# Altium PCB Etage PIC.PcbDoc
Units mm, origin at the board's own origin, x right, y up, seen from the top; angles counter-clockwise.
Board outline 70 x 70 mm, 4 copper layers (Top Layer, Internal Plane 1, Internal Plane 2, Bottom Layer); 22 components, 35 nets, 128 pads, 1 vias.
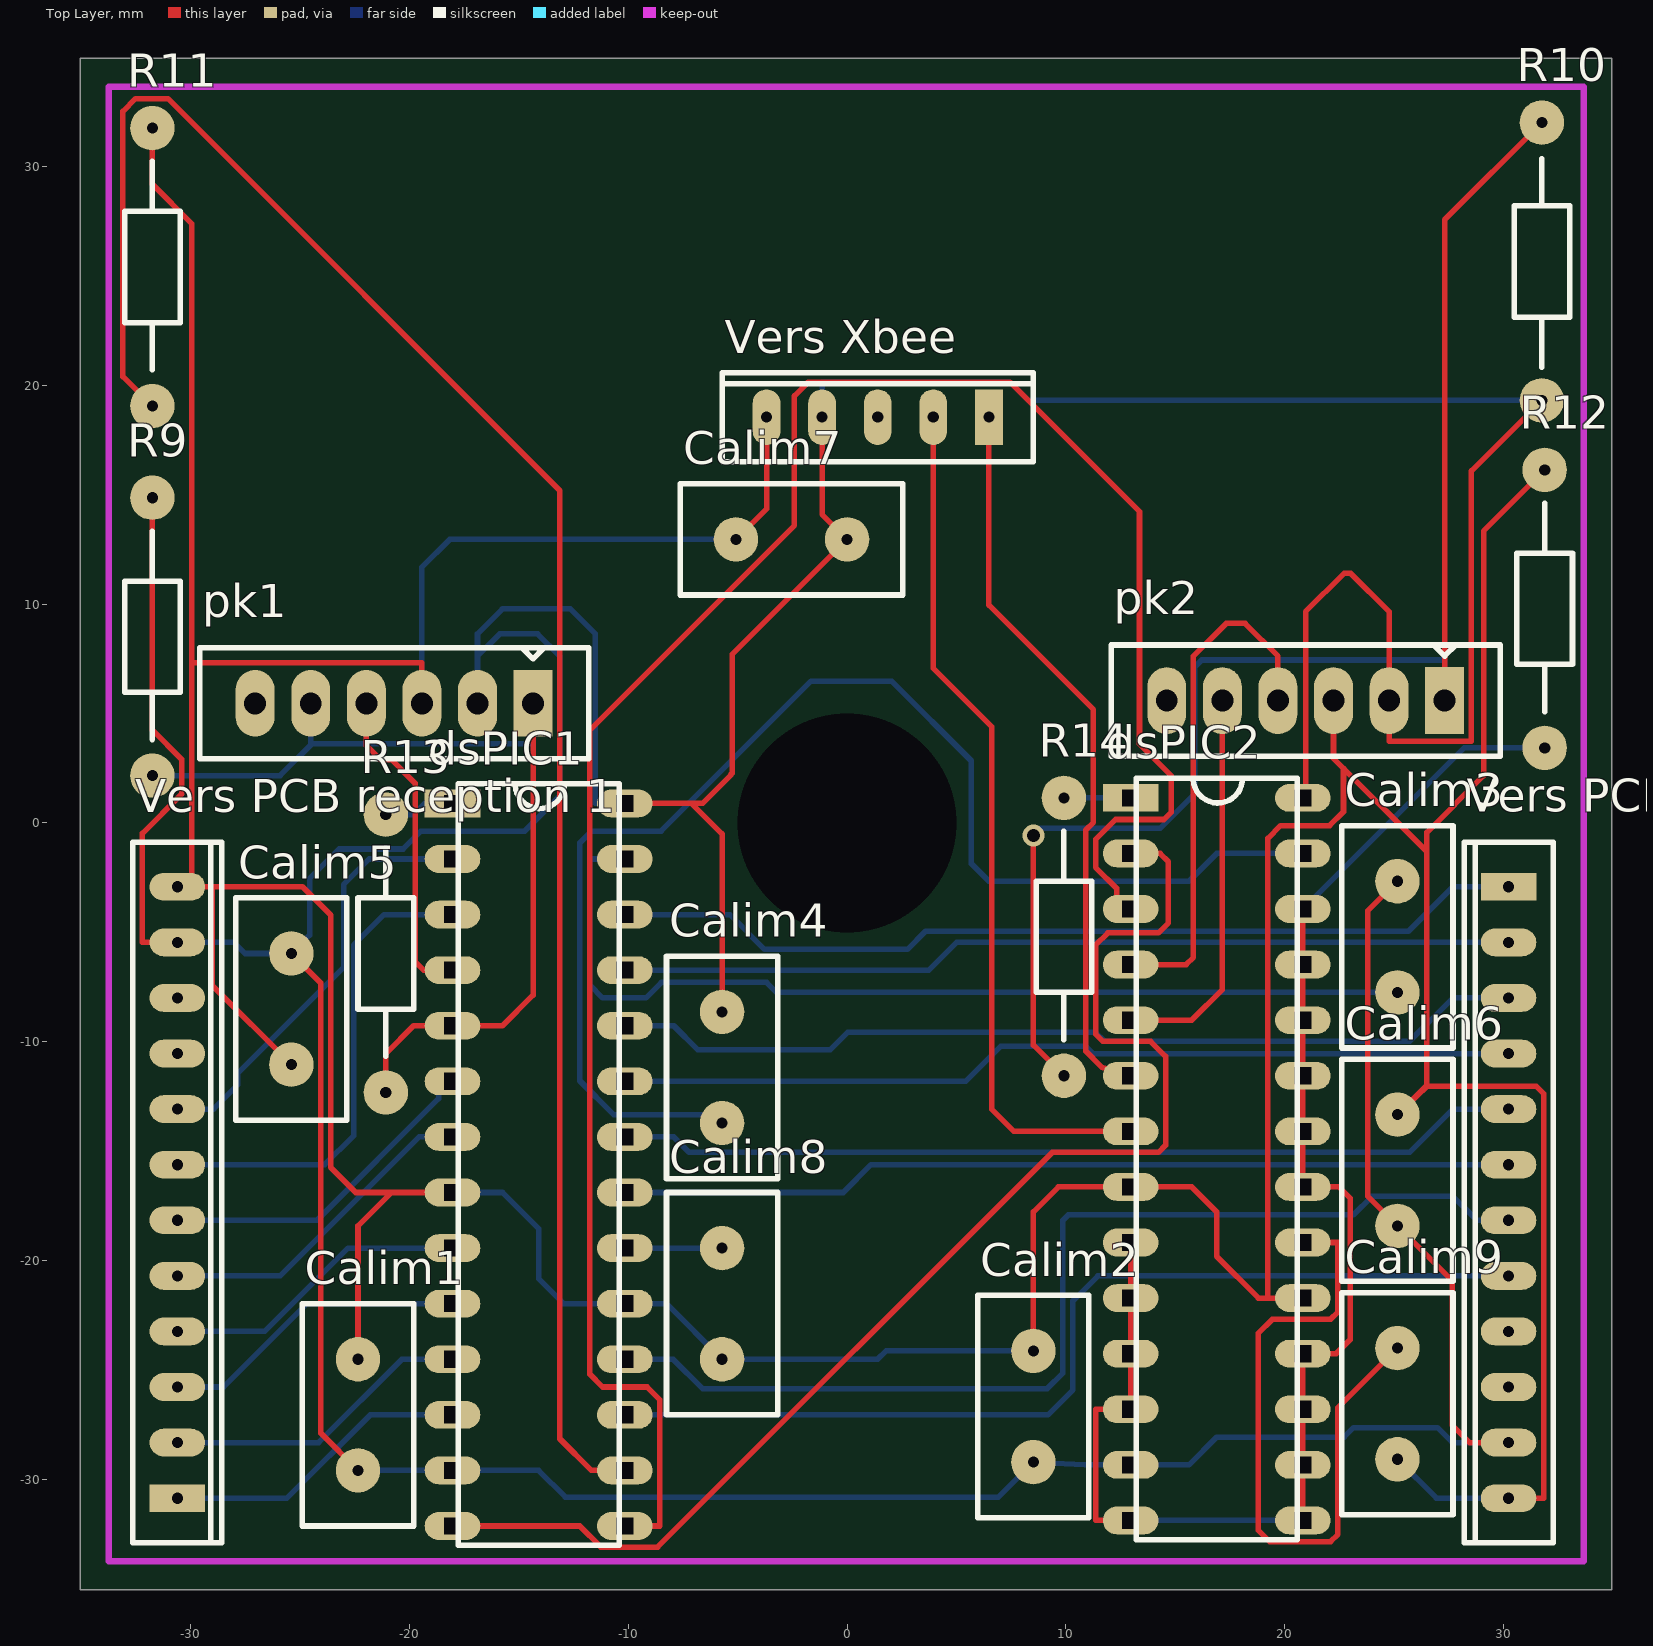
[diagram p0: Top Layer view]
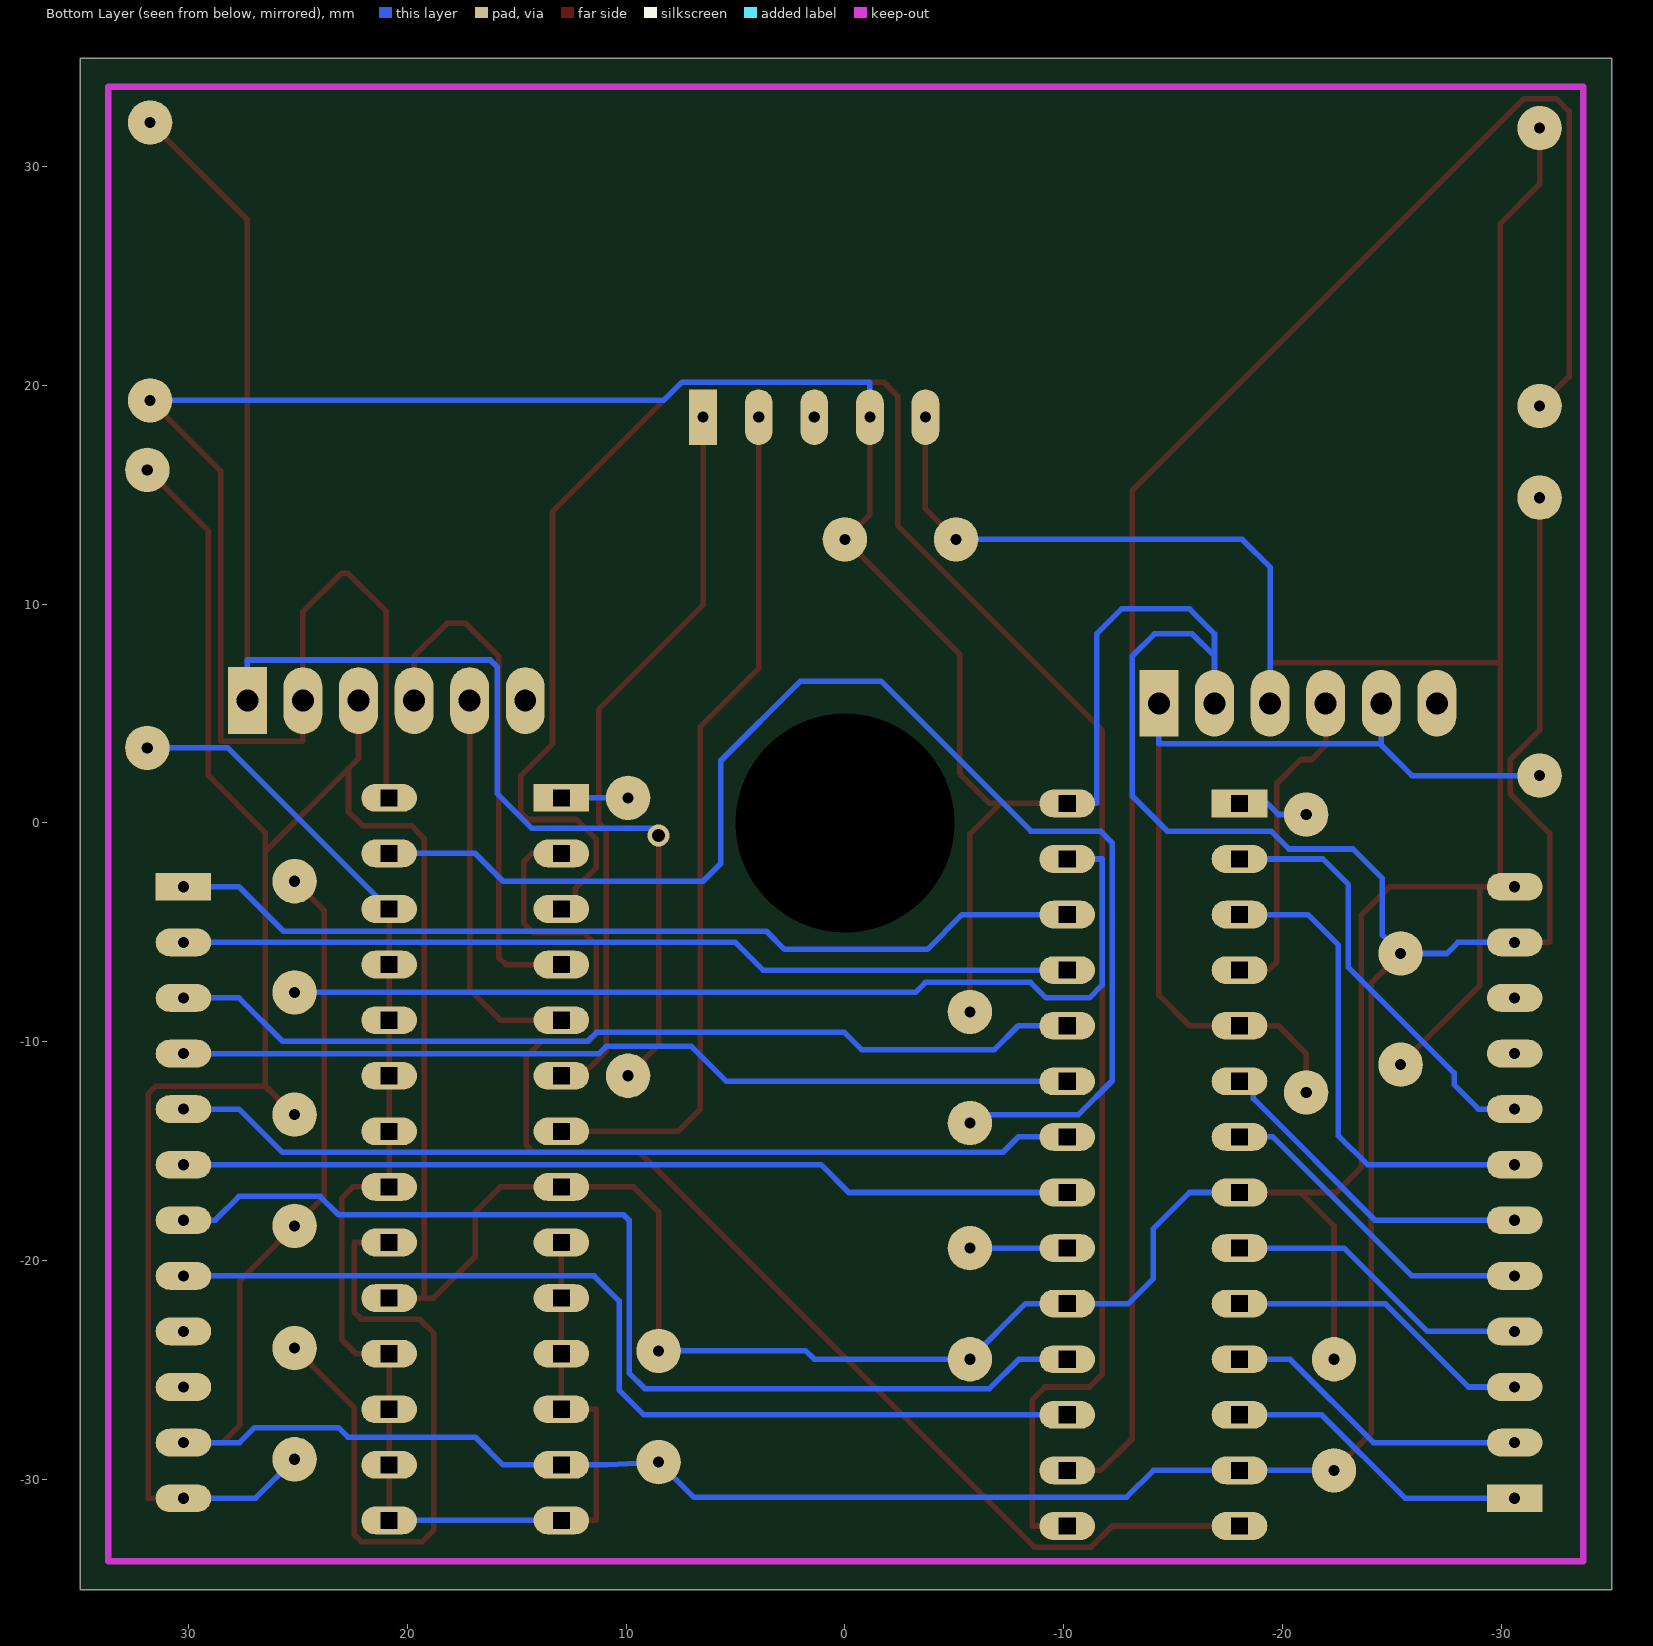
[diagram p1: Bottom Layer view, seen from below]
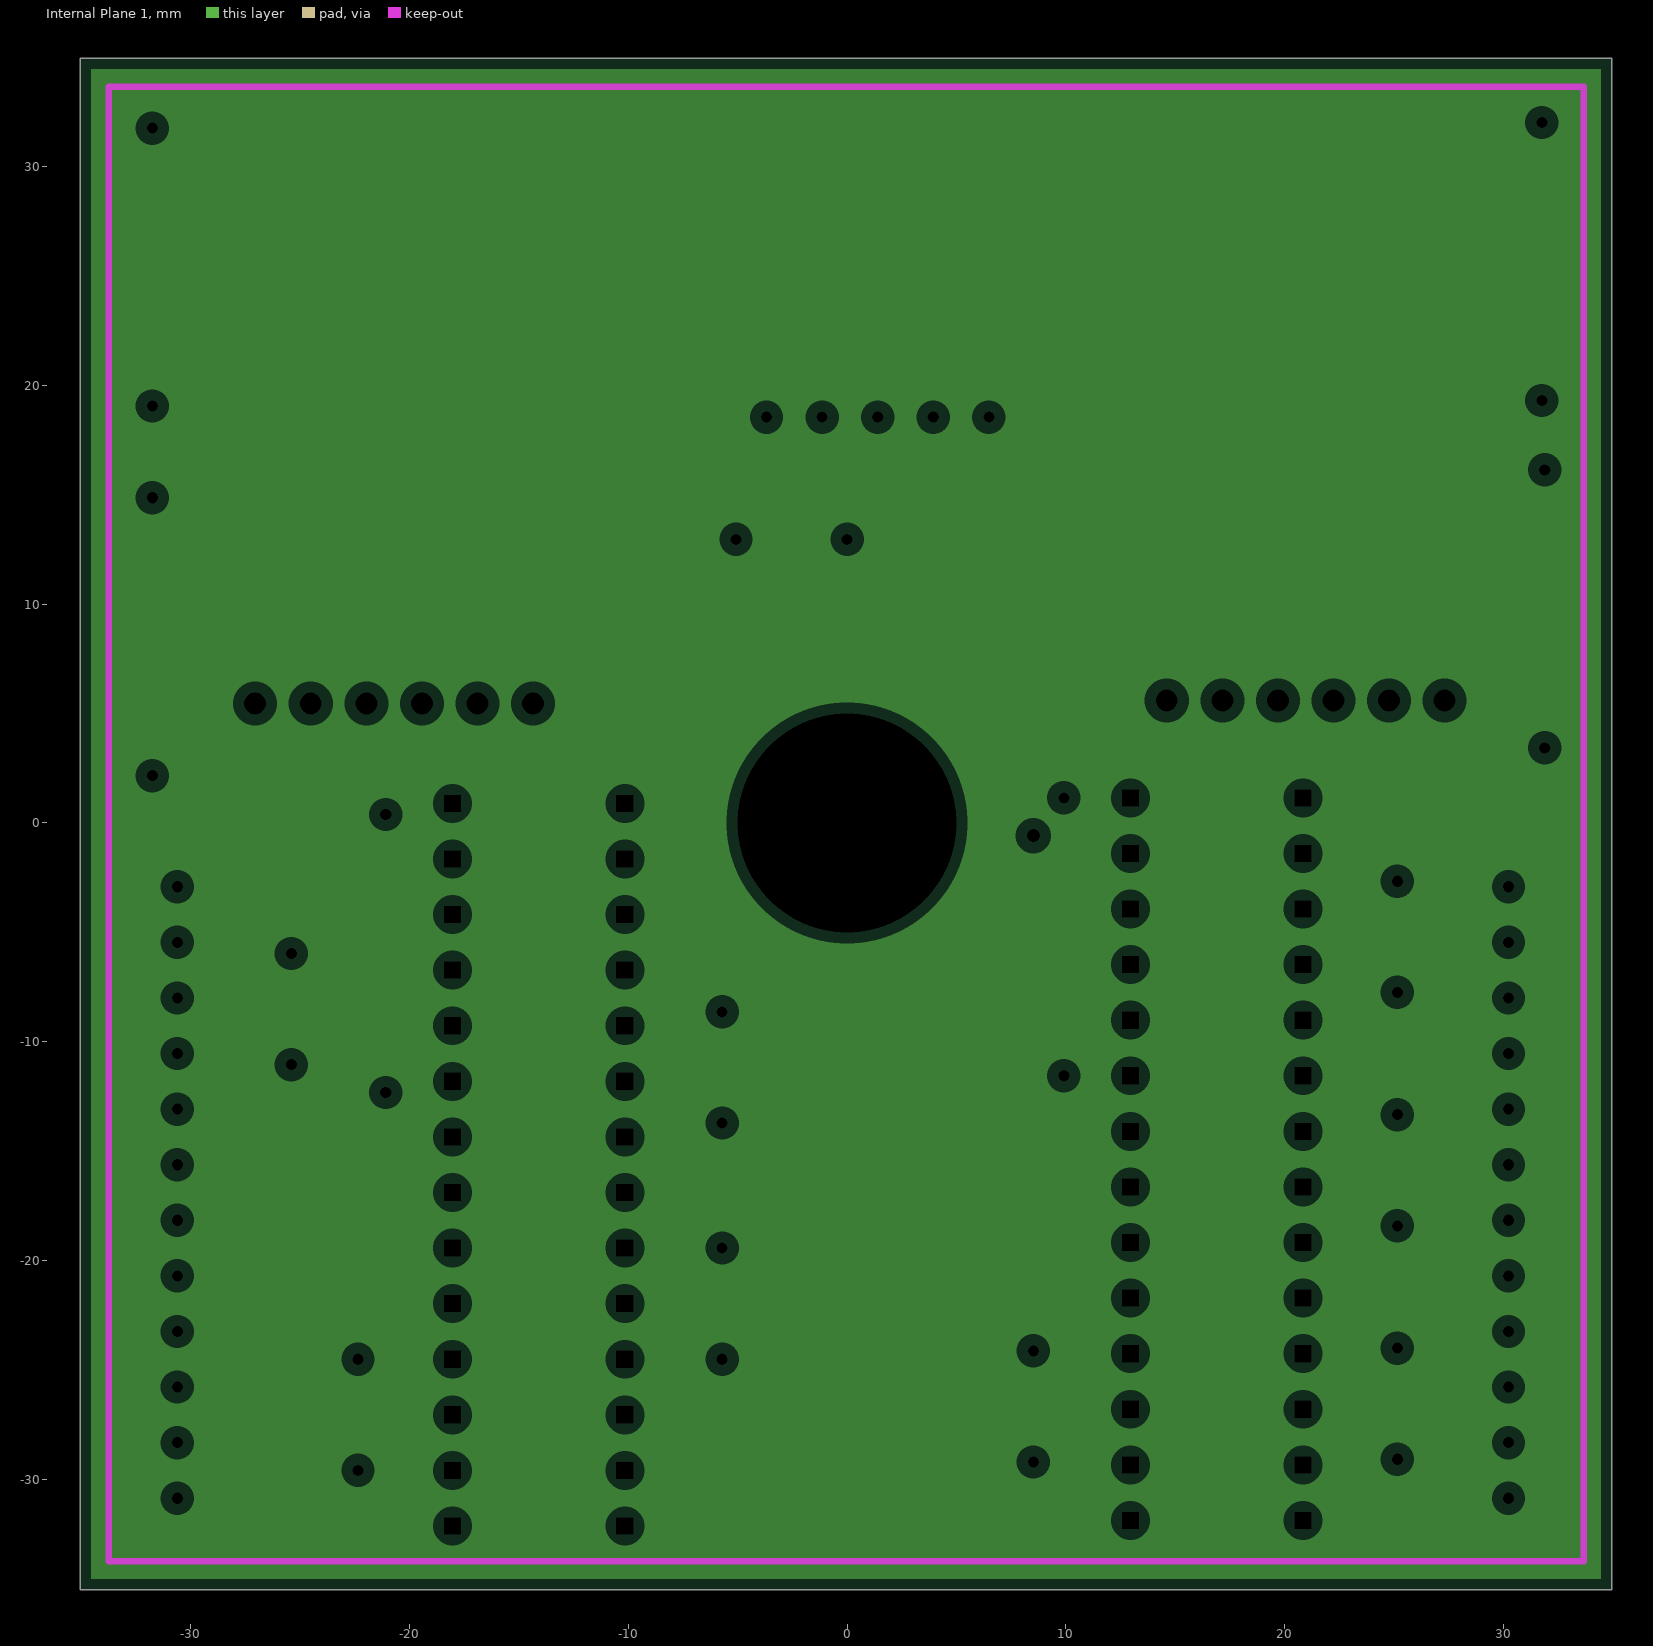
[diagram p2: Internal Plane 1, clearances drawn from the general rule]
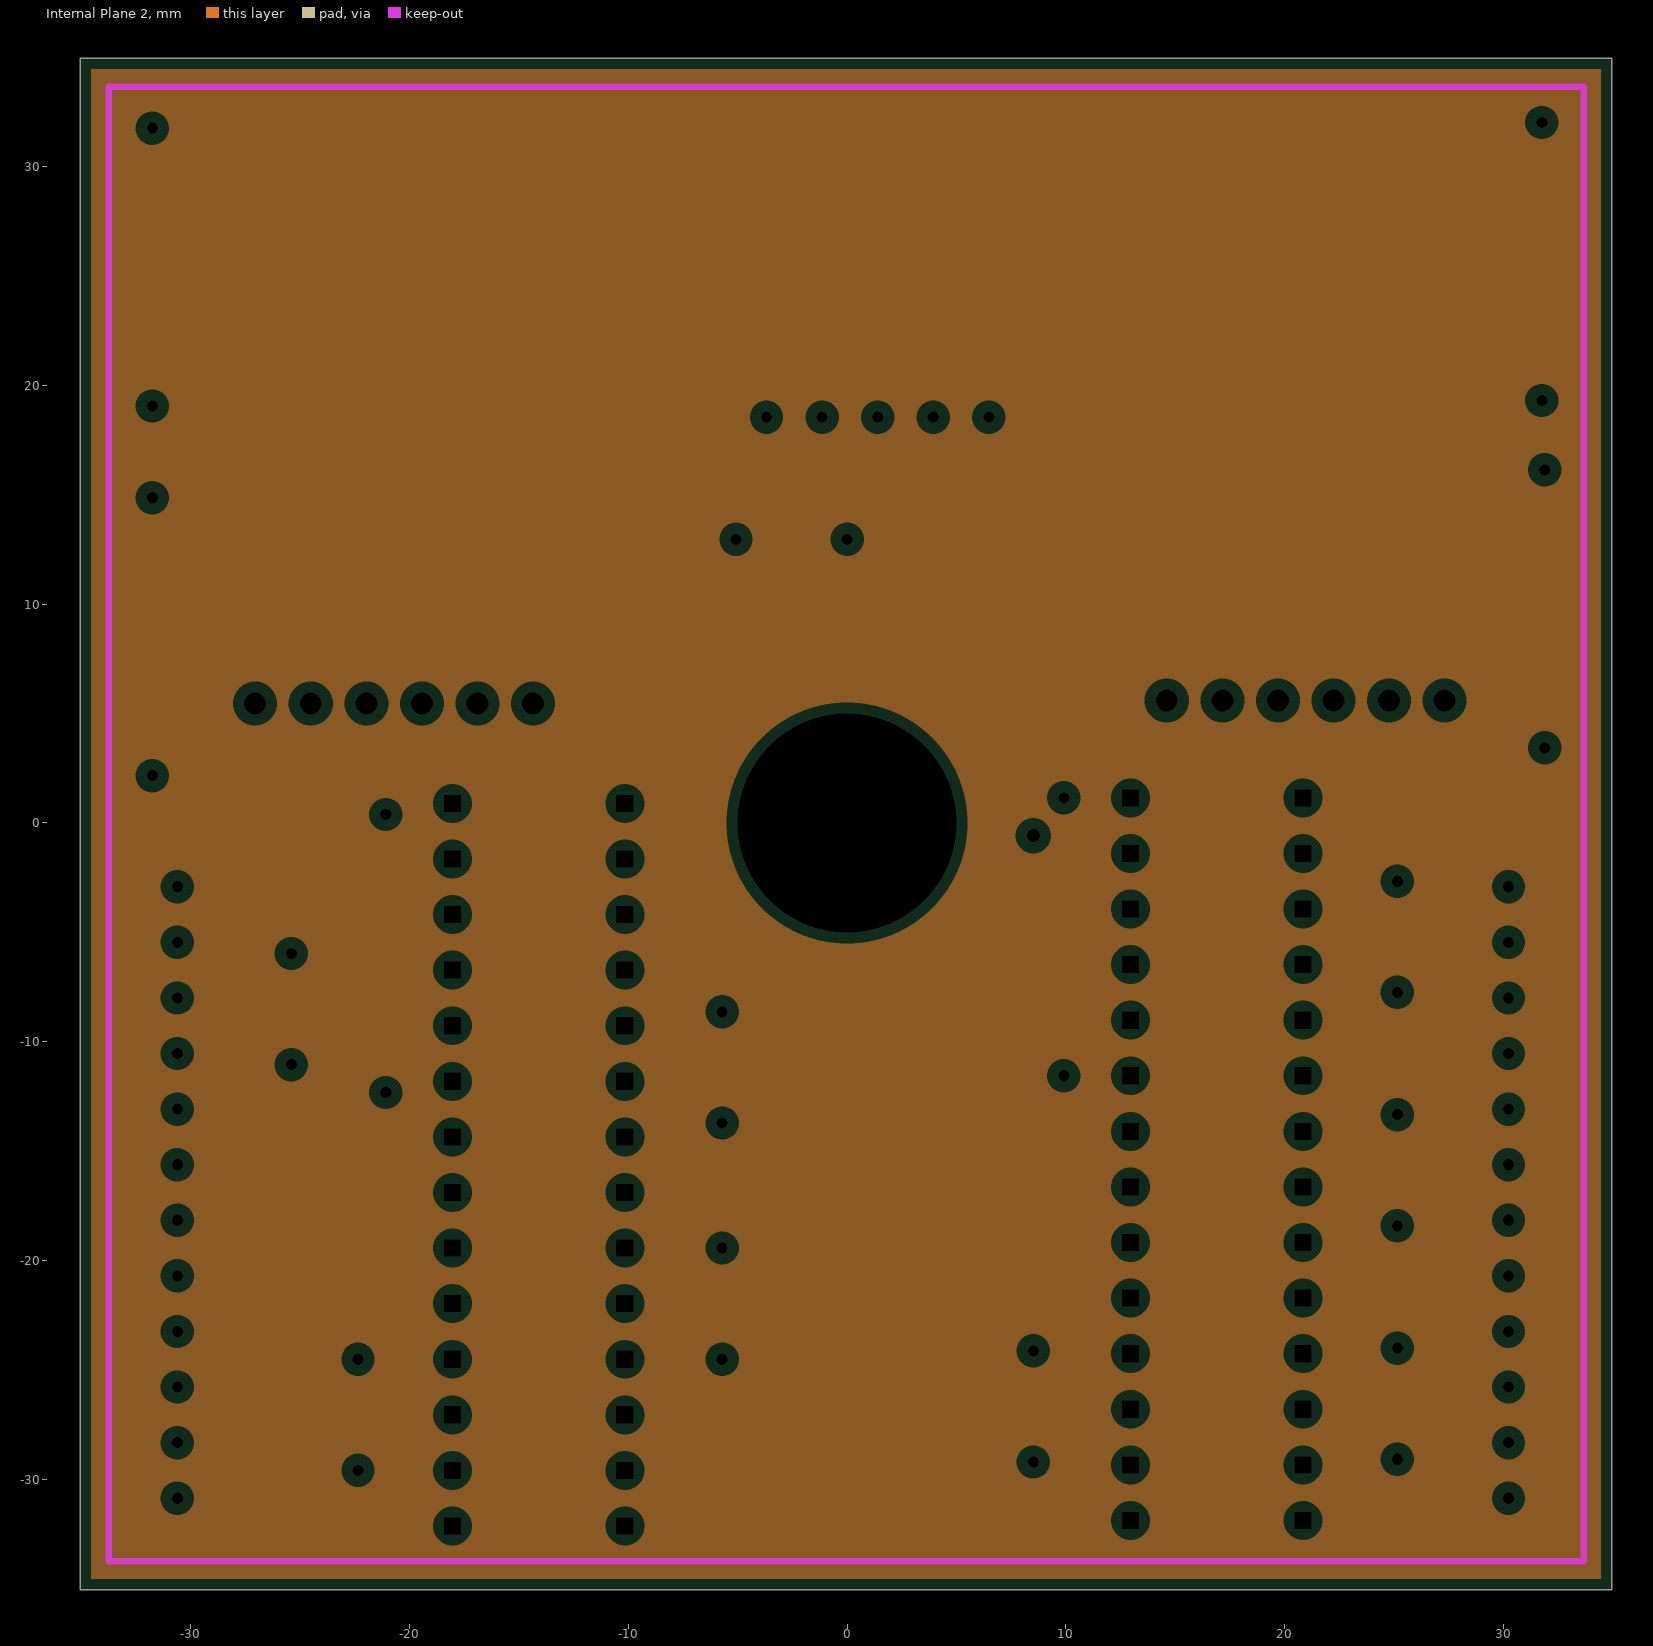
[diagram p3: Internal Plane 2, clearances drawn from the general rule]

## Layer stack, top to bottom
Top Layer: signal copper 0.0356
Dielectric: dielectric 0.32, FR-4, Dk 4.8
Internal Plane 1: plane copper 0.0356
Dielectric: dielectric 0.32, FR-4, Dk 4.8
Internal Plane 2: plane copper 0.0356
Dielectric: dielectric 0.32, FR-4, Dk 4.8
Bottom Layer: signal copper 0.0356

## Board outline
-35.052,-35.052 34.948,-35.052 34.948,34.948 -35.052,34.948

## Design rules (kind name [scope] priority, off if disabled: settings)
Clearance [All] p1: gap=0.2
PlaneClearance [All] p1: clearance=0.508
PlaneConnect [All] p1: planeconnectstyle=Relief reliefexpansion=0.508 reliefentries=4 reliefconductorwidth=0.254 reliefairgap=0.254
PolygonConnect [All] p1: connectstyle=Relief reliefconductorwidth=0.254 reliefentries=4 polygonreliefangle="90 Angle" airgapwidth=0.254
RoutingVias [All] p1: holewidth=0.6 width=1 viastyle="Through Hole" minholewidth=0.711 minwidth=1.27 maxholewidth=0.711 maxwidth=1.27
SolderMaskExpansion [All] p1: expansion=0.102
Width [All] p1: maxlimit=0.254 minlimit=0.254 preferedwidth=0.254
26 further rules are at their usual default settings.

## Components (designator, comment, footprint, x,y, rotation, side; value= is the part's Value field where it differs from the comment)
Calim1 "Cap2" CAPA2 -22.352,-29.591 r90 top
Calim2 "Cap2" CAPA2 8.509,-29.21 r90 top
Calim3 "Cap2" CAPA2 25.146,-2.667 r270 top
Calim4 "Cap2" CAPA2 -5.715,-8.636 r270 top
Calim5 "Cap2" CAPA2 -25.4,-11.049 r90 top
Calim6 "Cap2" CAPA2 25.146,-13.335 r270 top
Calim7 "Cap2" CAPA2 -5.08,12.954 r0 top
Calim8 "Cap2" CAPA2 -5.715,-19.431 r270 top
Calim9 "Cap2" CAPA2 25.146,-24.003 r270 top
dsPIC1 "dsPIC33FJ32MC" PCBComponent_1 -14.097,-15.621 r0 top
dsPIC2 "dsPIC33FJ32MC" PCBComponent_1 16.891,-15.367 r0 top
pk1 "pickit3" pickit3 -14.351,5.461 r180 top
pk2 "pickit3" pickit3 27.305,5.588 r180 top
R9 "Res2" res5_1/4W -31.75,14.859 r270 top
R10 "Res2" res5_1/4W 31.75,19.304 r90 top
R11 "Res2" res5_1/4W -31.75,31.75 r270 top
R12 "Res2" res5_1/4W 31.877,16.129 r270 top
R13 "Res2" res5_1/4W -21.082,0.381 r270 top
R14 "Res2" res5_1/4W 9.906,1.143 r270 top
"Vers PCB reception 1" "CONKK12" CONKK12 -30.607,-30.861 r90 top
"Vers PCB reception 2" "CONKK12" CONKK12 30.226,-2.921 r270 top
"Vers Xbee" "CONKK5" CONKK5 6.477,18.542 r180 top

## Footprints (in the part's own frame and the unit in brackets; to place one, negate y for a bottom-side part, rotate by r counter-clockwise, add the part's x,y. Pads: shape width x height; smd on the part's side, far side on the other; paste and mask are expansions set on the pad)
CAPA2 [mil]
  round 80 hole 20: 1(0,0) 2(200,0)
  silkscreen extent -100,-100 300,100
CONKK5 [mil]
  rect 50x100 hole 20: 1(0,0)
  oval 50x100 hole 20: 2(100,0) 3(200,0) 4(300,0) 5(400,0)
  silkscreen extent -80,-80 480,80
CONKK12 [mil]
  rect 50x100 hole 20: 1(0,0)
  oval 50x100 hole 20: 2(100,0) 3(200,0) 4(300,0) 5(400,0) 6(500,0) 7(600,0) 8(700,0) 9(800,0) 10(900,0) 11(1000,0) 12(1100,0)
  silkscreen extent -80,-80 1180,80
PCBComponent_1 [mil]
  rect 100x50 hole 30 square: 1(-155,650)
  oval 100x50 hole 30 square: 2(-155,550) 3(-155,450) 4(-155,350) 5(-155,250) 6(-155,150) 7(-155,50) 8(-155,-50) 9(-155,-150) 10(-155,-250) 11(-155,-350) 12(-155,-450) 13(-155,-550) 14(-155,-650) 15(155,-650) 16(155,-550) 17(155,-450) 18(155,-350) 19(155,-250) 20(155,-150) 21(155,-50) 22(155,50) 23(155,150) 24(155,250) 25(155,350) 26(155,450) 27(155,550) 28(155,650)
  silkscreen extent -145,-685 145,685
pickit3 [mil]
  rect 70x120 hole 39.37: 1(0,0)
  oval 70x120 hole 39.37: 2(100,0) 3(200,0) 4(300,0) 5(400,0) 6(500,0)
  silkscreen extent -100,-100 600,100
res5_1/4W [mil]
  round 80 hole 20: 1(0,0) 2(500,0)
  silkscreen extent 60,-50 435,50

## Part data
Calim1 Calim2 Calim3 Calim4 Calim5 Calim6 Calim7 Calim8 Calim9: "Capacitor"
R9 R10 R11 R12 R13 R14: "Resistor"

## Free pads (board coordinates)
  round 1.524 hole 10: 7(0,0)

## Via types
v1: diameter 1, hole 0.6, Top Layer to Bottom Layer, 1 vias

## Nets (pads, with @x,y where several pads share a name; then routed paths per layer and width w, separated by ;. In a path a pad name is that pad's centre, name@x,y a point inside that pad or via, vN(x,y) a via of type N, cw(c..) or ccw(c..) an arc to the next point about the centre after c; other vN are vias at no path point)
GND: "Vers PCB reception 1.12" "Vers PCB reception 2.12" "Vers Xbee.5" Calim1.2 Calim2.2 Calim5.1 Calim6.1 Calim7.1 Calim8.2 Calim9.2 dsPIC1.8 dsPIC1.19 dsPIC2.8 dsPIC2.19 pk1.3 pk2.3 R11.1 R12.1 | length 272.8
  Top Layer w0.254: R11.1 -31.75,29.185 -29.953,27.388 -29.953,7.315 ; -30.607,-2.921 -29.953,-2.921 ; Calim5.1 -29.007,-7.442 -29.007,-2.921 ; Calim1.2 -22.352,-18.415 -20.828,-16.891 ; pk1.3 -19.431,7.315 -29.953,7.315 ; dsPIC1.8 -20.828,-16.891 ; Calim7.1 -3.683,14.351 -3.683,18.542 ; Calim2.2 8.509,-17.78 9.652,-16.637 dsPIC2.8 15.748,-16.637 16.891,-17.78 16.891,-19.812 18.796,-21.717 19.228,-21.717 ; dsPIC2.19 19.228,-21.717 ; pk2.3 22.225,2.946 22.682,2.489 ; 30.226,-30.861 31.826,-30.861 31.826,-12.37 31.496,-12.04 26.492,-12.04 ; R12.1 29.083,13.335 29.083,2.159 26.492,-0.432 26.492,-1.321 ; -29.953,-2.921 -29.953,7.315 ; -29.953,-2.921 -29.007,-2.921 ; -29.007,-2.921 -24.892,-2.921 -23.597,-4.216 -23.597,-15.748 -22.454,-16.891 -20.828,-16.891 ; 19.228,-21.717 19.228,-0.711 19.812,-0.127 22.047,-0.127 22.682,0.508 22.682,2.489 ; 22.682,2.489 26.492,-1.321 ; 26.492,-12.04 26.492,-1.321 ; 26.492,-12.04 26.441,-12.04 Calim6.1 26.492,-12.04
  Bottom Layer w0.254: pk1.3 -19.431,11.684 -18.161,12.954 Calim7.1 ; dsPIC1.8 -15.748,-16.891 -14.097,-18.542 -14.097,-20.828 -12.954,-21.971 dsPIC1.19 -8.255,-21.971 Calim8.2 1.397,-24.511 1.778,-24.13 Calim2.2 ; Calim9.2 26.924,-30.861 30.226,-30.861
NetCalim3_2: Calim3.2 dsPIC1.27 | length 45
  Bottom Layer w0.254: dsPIC1.27 -11.76,-1.651 -11.76,-7.417 -11.176,-8.001 -9.195,-8.001 -8.484,-7.29 -3.683,-7.29 -3.226,-7.747 Calim3.2
NetCalim4_2: Calim4.2 dsPIC2.27 | length 61.6
  Bottom Layer w0.254: Calim4.2 -5.715,-13.335 -10.668,-13.335 -12.217,-11.786 -12.217,-0.914 -11.684,-0.381 -8.502,-0.381 -1.648,6.474 2.035,6.474 5.672,2.837 5.672,-1.862 6.477,-2.667 15.621,-2.667 16.891,-1.397 dsPIC2.27
NetdsPIC1_1: dsPIC1.1 R13.1 | length 3.3
  Bottom Layer w0.254: R13.1 -19.812,0.381 -19.304,0.889 dsPIC1.1
NetdsPIC1_2: "Vers PCB reception 1.8" dsPIC1.2 | length 19.8
  Bottom Layer w0.254: -30.607,-13.081 -28.956,-13.081 -27.838,-11.963 -27.838,-11.43 -23.012,-6.604 -23.012,-2.819 -21.844,-1.651 dsPIC1.2
NetdsPIC1_3: "Vers PCB reception 1.7" dsPIC1.3 | length 22.4
  Bottom Layer w0.254: -30.607,-15.621 -23.876,-15.621 -22.555,-14.3 -22.555,-5.588 -21.158,-4.191 dsPIC1.3
NetdsPIC1_4: dsPIC1.4 pk1.4 | length 14.9
  Top Layer w0.254: pk1.4 -21.971,3.531 -21.336,2.896 -20.828,2.896 -19.736,1.803 -19.736,-6.35 -19.355,-6.731 dsPIC1.4
NetdsPIC1_5: dsPIC1.5 pk1.1 pk1.5 R9.2 R13.2 | length 44.7
  Top Layer w0.254: R13.2 -21.082,-10.541 -19.812,-9.271 dsPIC1.5 -15.748,-9.271 -14.351,-7.874 pk1.1
  Bottom Layer w0.254: R9.2 -25.908,2.159 -24.511,3.556 -24.511,3.607 ; pk1.5 -24.511,3.607 ; pk1.1 -14.351,3.607 -24.511,3.607
NetdsPIC1_6: "Vers PCB reception 1.6" dsPIC1.6 | length 15.7
  Bottom Layer w0.254: -30.607,-18.161 -24.232,-18.161 -18.669,-12.598 -18.669,-11.811 dsPIC1.6
NetdsPIC1_7: "Vers PCB reception 1.5" dsPIC1.7 | length 15.2
  Bottom Layer w0.254: -30.607,-20.701 -25.908,-20.701 -19.558,-14.351 dsPIC1.7
NetdsPIC1_9: "Vers PCB reception 1.4" dsPIC1.9 | length 14.2
  Bottom Layer w0.254: -30.607,-23.241 -26.619,-23.241 -22.809,-19.431 dsPIC1.9
NetdsPIC1_10: "Vers PCB reception 1.3" dsPIC1.10 | length 14.2
  Bottom Layer w0.254: -30.607,-25.781 -28.499,-25.781 -24.689,-21.971 dsPIC1.10
NetdsPIC1_11: "Vers PCB reception 1.2" dsPIC1.11 | length 14.2
  Bottom Layer w0.254: -30.607,-28.321 -24.155,-28.321 -20.345,-24.511 dsPIC1.11
NetdsPIC1_12: "Vers PCB reception 1.1" dsPIC1.12 | length 14.2
  Bottom Layer w0.254: -30.607,-30.861 -25.603,-30.861 -21.793,-27.051 dsPIC1.12
NetdsPIC1_16: dsPIC1.16 R11.2 | length 88.5
  Top Layer w0.254: R11.2 -33.096,20.396 -33.096,32.512 -32.512,33.096 -31.039,33.096 -13.132,15.189 -13.132,-28.143 -11.684,-29.591 dsPIC1.16
NetdsPIC1_17: "Vers PCB reception 2.8" dsPIC1.17 | length 45.4
  Bottom Layer w0.254: dsPIC1.17 9.169,-27.051 10.312,-25.908 10.312,-21.844 11.455,-20.701 30.226,-20.701
NetdsPIC1_18: "Vers PCB reception 2.7" dsPIC1.18 | length 49.1
  Bottom Layer w0.254: dsPIC1.18 -7.95,-24.511 -6.604,-25.857 9.144,-25.857 9.855,-25.146 9.855,-18.161 10.109,-17.907 23.139,-17.907 23.978,-17.069 27.686,-17.069 28.778,-18.161 30.226,-18.161
NetdsPIC1_21: "Vers PCB reception 2.6" dsPIC1.21 | length 40.9
  Bottom Layer w0.254: dsPIC1.21 -0.178,-16.891 1.092,-15.621 30.226,-15.621
NetdsPIC1_22: "Vers PCB reception 2.5" dsPIC1.22 | length 41.5
  Bottom Layer w0.254: dsPIC1.22 -7.925,-14.351 -7.214,-15.062 25.705,-15.062 27.686,-13.081 30.226,-13.081
NetdsPIC1_23: "Vers PCB reception 2.4" dsPIC1.23 | length 41.2
  Bottom Layer w0.254: dsPIC1.23 5.41,-11.811 7.01,-10.211 10.903,-10.211 11.233,-10.541 30.226,-10.541
NetdsPIC1_24: "Vers PCB reception 2.3" dsPIC1.24 | length 42.2
  Bottom Layer w0.254: dsPIC1.24 -7.925,-9.271 -6.833,-10.363 -0.762,-10.363 0.025,-9.576 11.354,-9.576 11.757,-9.979 25.708,-9.979 27.686,-8.001 30.226,-8.001
NetdsPIC1_25: "Vers PCB reception 2.2" dsPIC1.25 | length 40.9
  Bottom Layer w0.254: dsPIC1.25 3.734,-6.731 5.004,-5.461 30.226,-5.461
NetdsPIC1_26: "Vers PCB reception 2.1" dsPIC1.26 | length 42.2
  Bottom Layer w0.254: dsPIC1.26 -5.359,-4.191 -3.769,-5.781 2.753,-5.781 3.581,-4.953 25.654,-4.953 27.686,-2.921 30.226,-2.921
NetdsPIC2_1: dsPIC2.1 R14.1 | length 3
  Bottom Layer w0.254: R14.1 dsPIC2.1
NetdsPIC2_4: dsPIC2.4 pk2.4 | length 23.9
  Top Layer w0.254: dsPIC2.4 15.494,-6.477 15.824,-6.147 15.824,7.62 17.323,9.119 18.186,9.119 19.685,7.62 pk2.4
NetdsPIC2_5: dsPIC2.5 pk2.5 | length 18
  Top Layer w0.254: dsPIC2.5 15.748,-9.017 17.145,-7.62 pk2.5
Netpk2_1: pk2.1 R10.2 R14.2 | length 67.2
  Top Layer w0.254: v1(8.509,-0.584) 8.509,-10.16 R14.2 ; pk2.1 27.305,27.559 R10.2
  Bottom Layer w0.254: v1(8.509,-0.584) 8.839,-0.254 14.3,-0.254 15.875,1.321 15.875,7.112 16.205,7.442 27.305,7.442 pk2.1
"UNUSED I/O 2": dsPIC2.9 dsPIC2.10 dsPIC2.11 dsPIC2.12 dsPIC2.14 dsPIC2.15 dsPIC2.16 dsPIC2.17 dsPIC2.18 dsPIC2.21 dsPIC2.22 dsPIC2.23 dsPIC2.24 dsPIC2.25 dsPIC2.26 R12.2 | length 69.5
  Top Layer w0.254: dsPIC2.14 11.354,-31.877 11.354,-26.797 dsPIC2.12 dsPIC2.11 dsPIC2.10 dsPIC2.9 ; dsPIC2.15 dsPIC2.16 dsPIC2.17 dsPIC2.18 22.352,-24.257 22.987,-23.622 22.987,-17.145 22.479,-16.637 dsPIC2.21 dsPIC2.22 dsPIC2.23 dsPIC2.24 dsPIC2.25 dsPIC2.26
  Bottom Layer w0.254: dsPIC2.14 dsPIC2.15 ; dsPIC2.26 28.194,3.429 R12.2
VDD1: "Vers PCB reception 1.11" "Vers PCB reception 2.11" "Vers Xbee.4" Calim1.1 Calim2.1 Calim3.1 Calim4.1 Calim5.2 Calim6.2 Calim7.2 dsPIC1.13 dsPIC1.28 dsPIC2.13 dsPIC2.28 pk1.2 pk2.2 R9.1 R10.1 | length 294.4
  Top Layer w0.254: R9.1 -31.75,4.242 -30.407,2.899 -30.407,1.318 -32.207,-0.483 -32.207,-5.461 -30.607,-5.461 ; Calim5.2 -24.054,-7.315 -24.054,-27.889 Calim1.1 ; dsPIC1.28 -7.112,0.889 ; Calim4.1 -5.715,-0.508 -7.112,0.889 ; -1.143,18.542 -1.143,14.097 Calim7.2 -5.258,7.696 -5.258,2.276 -5.327,2.207 -5.327,2.166 -6.604,0.889 -7.112,0.889 ; dsPIC2.28 20.955,1.143 20.955,9.652 22.708,11.405 23.012,11.405 24.765,9.652 pk2.2 24.765,3.734 28.524,3.734 28.524,16.078 R10.1 ; Calim3.1 23.8,-4.013 23.8,-17.069 Calim6.2 27.661,-20.93 27.661,-27.534 28.448,-28.321 30.226,-28.321
  Bottom Layer w0.254: -30.607,-5.461 -28.016,-5.461 -27.508,-5.969 Calim5.2 -24.562,-5.131 -24.562,-2.54 -23.216,-1.194 -20.295,-1.194 -19.482,-0.381 -14.732,-0.381 -13.132,1.219 -13.132,7.62 -14.148,8.636 -15.875,8.636 -16.891,7.62 ; Calim1.1 dsPIC1.13 -14.097,-29.591 -12.878,-30.81 6.909,-30.81 Calim2.1 10.871,-29.337 dsPIC2.13 15.621,-29.337 16.891,-28.067 22.708,-28.067 23.139,-27.635 26.975,-27.635 27.661,-28.321 30.226,-28.321 ; pk1.2 -16.891,7.62 ; dsPIC1.28 -11.506,0.889 -11.506,8.636 -12.649,9.779 -15.748,9.779 -16.891,8.636 -16.891,7.62 ; -1.143,18.542 -1.143,20.142 7.442,20.142 8.28,19.304 R10.1
VDDCORE1: Calim8.1 dsPIC1.20 | length 4.4
  Bottom Layer w0.254: dsPIC1.20 Calim8.1
VDDCORE2: Calim9.1 dsPIC2.20 | length 31.4
  Top Layer w0.254: dsPIC2.20 22.428,-19.177 22.428,-22.352 22.098,-22.682 19.431,-22.682 18.796,-23.317 18.796,-32.334 19.304,-32.842 22.098,-32.842 22.428,-32.512 22.428,-26.721 Calim9.1
"VERS PIC 2 - 1": dsPIC1.14 dsPIC2.2 | length 60.8
  Top Layer w0.254: dsPIC1.14 -12.217,-32.131 -11.252,-33.096 -8.661,-33.096 9.373,-15.062 14.224,-15.062 14.554,-14.732 14.554,-10.668 13.868,-9.982 11.684,-9.982 11.357,-9.655 11.357,-5.588 11.916,-5.029 14.224,-5.029 14.681,-4.572 14.681,-1.778 14.3,-1.397 dsPIC2.2
"VERS PIC 2 - 2": dsPIC1.15 dsPIC2.3 | length 100.6
  Top Layer w0.254: dsPIC1.15 -8.56,-32.131 -8.56,-26.365 -9.144,-25.781 -11.176,-25.781 -11.76,-25.197 -11.76,4.242 -2.413,13.589 -2.413,19.507 -1.778,20.142 7.442,20.142 13.36,14.224 13.36,3.607 14.808,2.159 14.808,0.483 14.478,0.152 12.268,0.152 11.357,-0.759 11.357,-2.035 12.319,-2.997 12.319,-3.937 dsPIC2.3
XBEE1: "Vers Xbee.1" dsPIC2.6 | length 33.5
  Top Layer w0.254: 6.477,18.542 6.477,9.957 11.252,5.182 11.252,0.019 10.903,-0.33 10.903,-10.433 11.633,-11.163 dsPIC2.6
XBEE2: "Vers Xbee.2" dsPIC2.7 | length 39.5
  Top Layer w0.254: 3.937,18.542 3.937,7.061 6.604,4.394 6.604,-13.081 7.62,-14.097 dsPIC2.7
pads on no net: "Vers PCB reception 1.9" "Vers PCB reception 1.10" "Vers PCB reception 2.9" "Vers PCB reception 2.10" "Vers Xbee.3" pk1.6 pk2.6

## Polygon pours and split planes (outlines as drawn)
no net on Internal Plane 1 (split plane): 34.438,-34.542 -34.542,-34.542 -34.542,34.438 34.438,34.438
no net on Internal Plane 2 (split plane): 34.438,-34.542 -34.542,-34.542 -34.542,34.438 34.438,34.438

## Keep-outs
Keep-Out Layer:
  lines w0.3: -33.752,-33.752 -33.752,33.648 33.655,33.648 33.655,-33.752 -33.752,-33.752

## Silkscreen, mask and mechanical layers (free items; w line width, h text height)
Drill Drawing:
  text ".LEGEND" at -74.399,-78.867 h1.52
  text "Drill Drawing." at -74.399,-81.407 h1.52

## Dimensions
-33.752,-33.752 to -33.752,33.648 on Mechanical 1
-33.752,-33.752 to 33.655,-33.752 on Mechanical 1